# EAGLE board SparkFun_Shift_Register_Breakout-74HC595_Panel_v11b (EAGLE 7.5.0), part 1 of 2
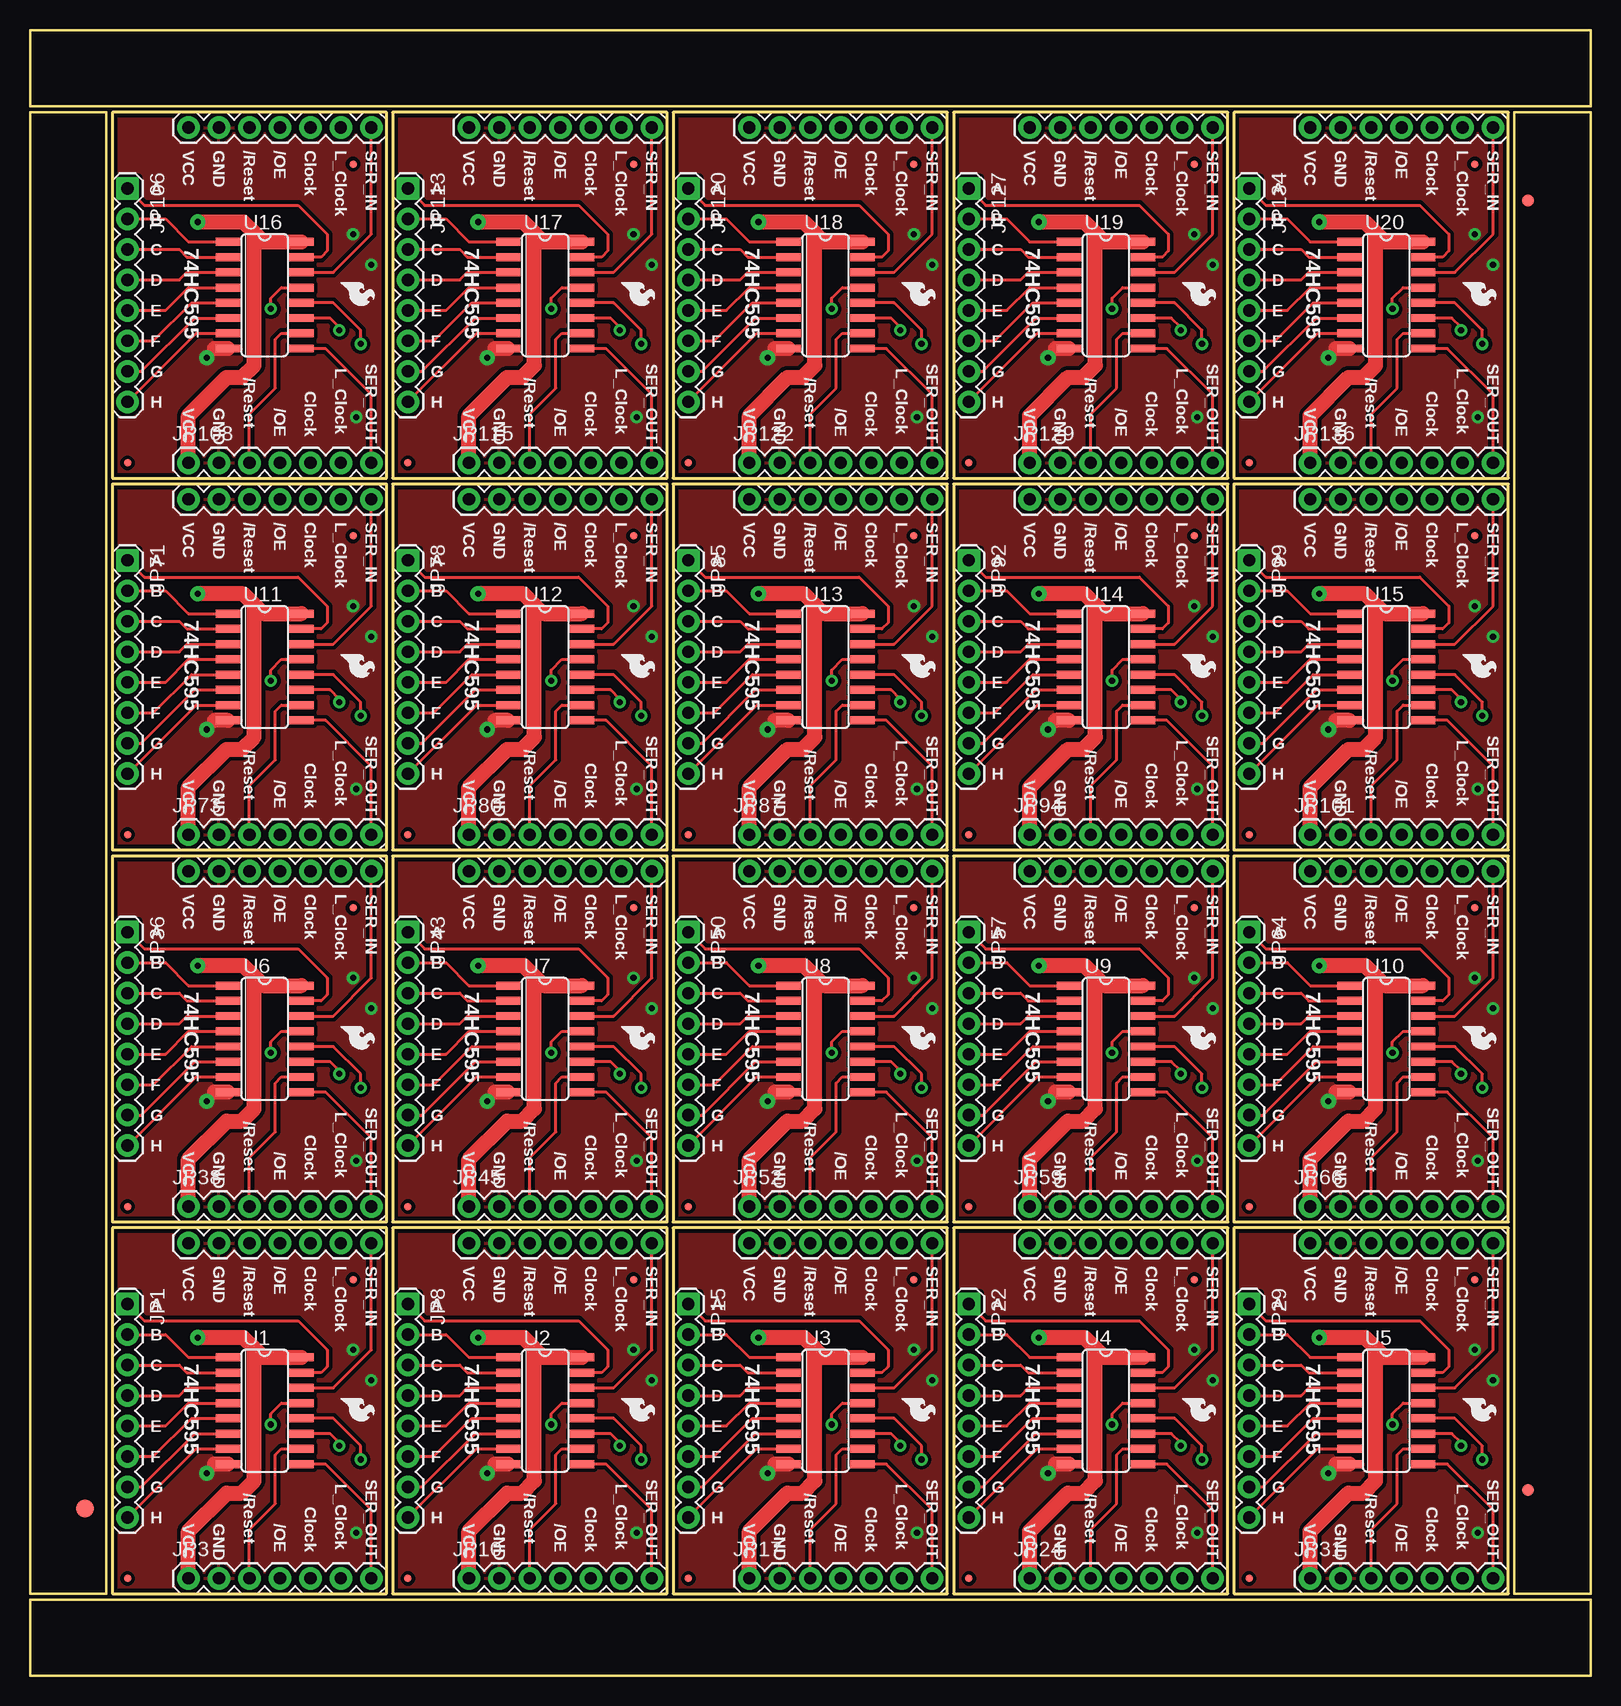
[diagram p0: board, top side]
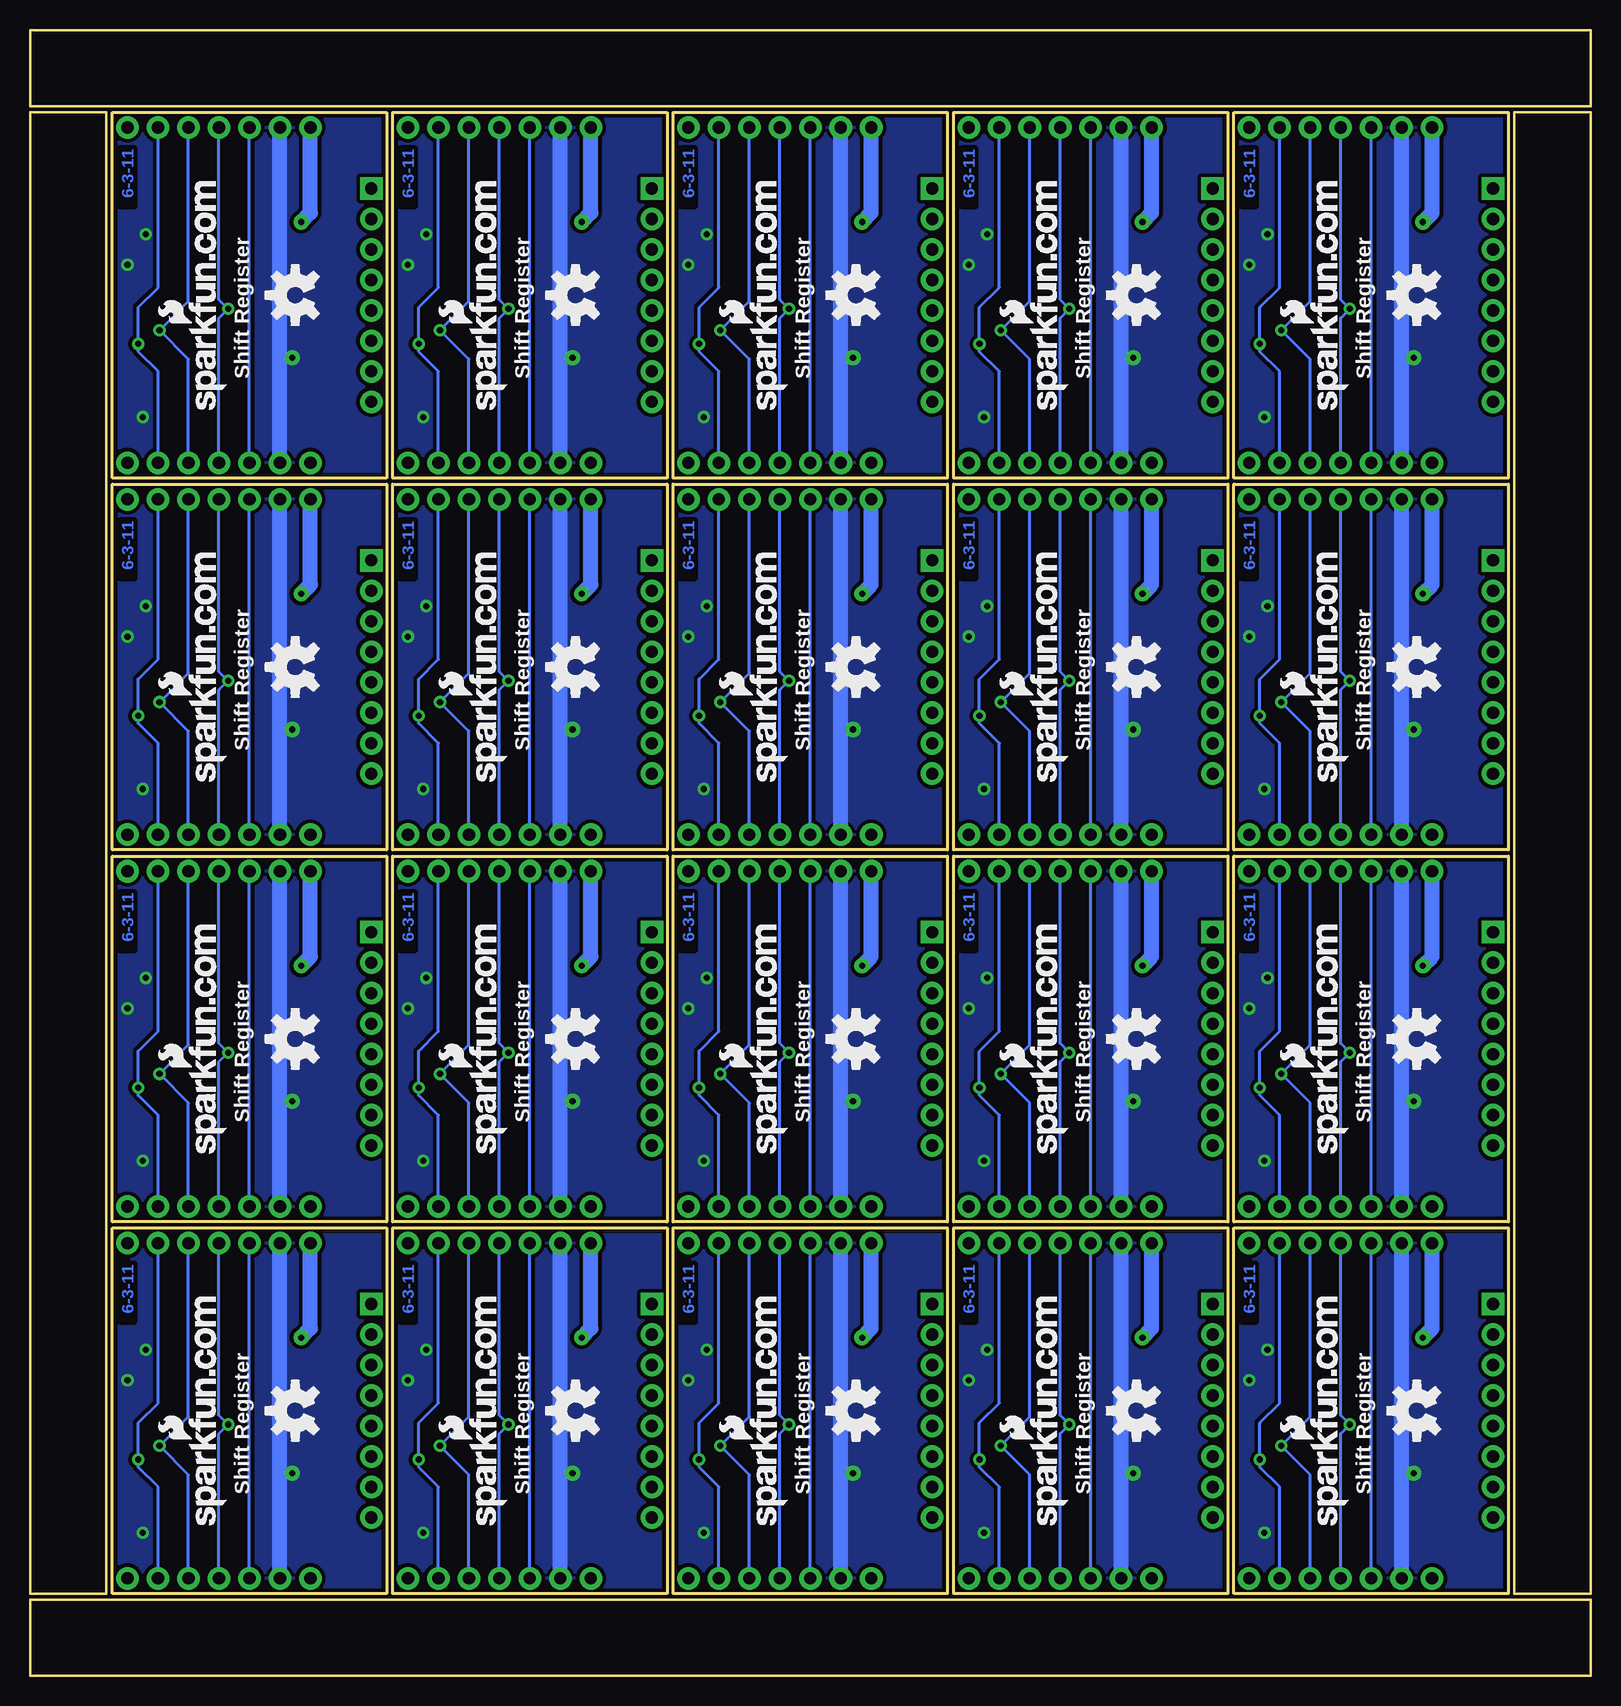
[diagram p1: board, bottom side, seen from below]

Size 130.05 x 137.16 mm. Coordinates in mm from the lower left corner, seen from the top.
Outline: 6.35,79.25 6.35,6.86 0,6.86 0,29.72
Outline: 0,27.18 0,130.3 6.35,130.3 6.35,76.71
Outline: 79.25,0 0,0 0,6.35 29.72,6.35
Outline: 27.18,6.35 130.05,6.35 130.05,0 76.71,0
Outline: 130.05,79.25 130.05,6.86 123.7,6.86 123.7,29.72
Outline: 123.7,27.18 123.7,130.3 130.05,130.3 130.05,76.71
Outline: 50.8,137.16 130.05,137.16 130.05,130.81 100.33,130.81
Outline: 102.87,130.81 0,130.81 0,137.16 53.34,137.16
Outline: 6.86,6.86 29.72,6.86 29.72,37.34 6.86,37.34 6.86,6.86
Outline: 30.23,6.86 53.09,6.86 53.09,37.34 30.23,37.34 30.23,6.86
Outline: 53.59,6.86 76.45,6.86 76.45,37.34 53.59,37.34 53.59,6.86
Outline: 76.96,6.86 99.82,6.86 99.82,37.34 76.96,37.34 76.96,6.86
Outline: 100.33,6.86 123.19,6.86 123.19,37.34 100.33,37.34 100.33,6.86
Outline: 6.86,37.85 29.72,37.85 29.72,68.33 6.86,68.33 6.86,37.85
Outline: 30.23,37.85 53.09,37.85 53.09,68.33 30.23,68.33 30.23,37.85
Outline: 53.59,37.85 76.45,37.85 76.45,68.33 53.59,68.33 53.59,37.85
Outline: 76.96,37.85 99.82,37.85 99.82,68.33 76.96,68.33 76.96,37.85
Outline: 100.33,37.85 123.19,37.85 123.19,68.33 100.33,68.33 100.33,37.85
Outline: 6.86,68.83 29.72,68.83 29.72,99.31 6.86,99.31 6.86,68.83
Outline: 30.23,68.83 53.09,68.83 53.09,99.31 30.23,99.31 30.23,68.83
Outline: 53.59,68.83 76.45,68.83 76.45,99.31 53.59,99.31 53.59,68.83
Outline: 76.96,68.83 99.82,68.83 99.82,99.31 76.96,99.31 76.96,68.83
Outline: 100.33,68.83 123.19,68.83 123.19,99.31 100.33,99.31 100.33,68.83
Outline: 6.86,99.82 29.72,99.82 29.72,130.3 6.86,130.3 6.86,99.82
Outline: 30.23,99.82 53.09,99.82 53.09,130.3 30.23,130.3 30.23,99.82
Outline: 53.59,99.82 76.45,99.82 76.45,130.3 53.59,130.3 53.59,99.82
Outline: 76.96,99.82 99.82,99.82 99.82,130.3 76.96,130.3 76.96,99.82
Outline: 100.33,99.82 123.19,99.82 123.19,130.3 100.33,130.3 100.33,99.82
Copper layers (1*16): Top 0.035mm / dielectric 1.5mm / Bottom 0.035mm
Design rules "SparkFun": minimum track width 8mil, minimum drill 20mil, track to track 8mil, track to pad 8mil, pad to pad 8mil, via to via 8mil, smd to smd 8mil, copper to edge 8mil, drill to drill 8mil, minimum pad ring 12mil, minimum via ring 10mil, stop-mask expansion 4mil, vias tented up to drill 20mil, thermal gap 10mil

## Footprints (pad centres in the part's own frame; a part is rotated, then mirrored left to right if it is on the bottom)
FIDUCIAL-1.5X3 = smd 1.5 x 1.5: 1 0,0
FIDUCIAL-1X2 = smd 1 x 1: 1 0,0
1X08 = drill 1.016 pad 1.88 square: 1 0,0 | drill 1.016 pad 1.88: 2 2.54,0; 3 5.08,0; 4 7.62,0; 5 10.16,0; 6 12.7,0; 7 15.24,0; 8 17.78,0
1X07 = drill 1.016 pad 1.88: 1 0,0; 2 2.54,0; 3 5.08,0; 4 7.62,0; 5 10.16,0; 6 12.7,0; 7 15.24,0
FIDUCIAL-1X2.5 = smd 0.635 x 0.635: 1 0,0
SO16 = smd 0.66 x 2.032: 1 -4.445,-3.073; 2 -3.175,-3.073; 3 -1.905,-3.073; 4 -0.635,-3.073; 5 0.635,-3.073; 6 1.905,-3.073; 7 3.175,-3.073; 8 4.445,-3.073; 9 4.445,3.073; 10 3.175,3.073; 11 1.905,3.073; 12 0.635,3.073; 13 -0.635,3.073; 14 -1.905,3.073; 15 -3.175,3.073; 16 -4.445,3.073

## Placement (x,y rotation side)
E$1  [FIDUCIAL-1.5X3]  4.57,13.97 0 top
E$5  [FIDUCIAL-1X2]  124.84,15.49 0 top
E$6  [FIDUCIAL-1X2]  124.84,122.94 180 top
JP1  [1X08]  8.13,30.99 270 top
JP2  [1X07]  13.21,36.07 0 top
JP3  [1X07]  13.21,8.13 0 top
JP4  LOGO-SFENEW  [SFE-NEW-WEBLOGO]  20.19,12.57 90 bottom
JP5  LOGO-SFESK  [SFE-LOGO-FLAME]  25.91,23.11 270 top
JP6  FIDUCIAL1X2.5  [FIDUCIAL-1X2.5]  8.13,8.13 0 top
JP7  FIDUCIAL1X2.5  [FIDUCIAL-1X2.5]  26.92,33.02 0 top
JP8  [1X08]  31.5,30.99 270 top
JP9  [1X07]  36.58,36.07 0 top
JP10  [1X07]  36.58,8.13 0 top
JP11  LOGO-SFENEW  [SFE-NEW-WEBLOGO]  43.56,12.57 90 bottom
JP12  LOGO-SFESK  [SFE-LOGO-FLAME]  49.28,23.11 270 top
JP13  FIDUCIAL1X2.5  [FIDUCIAL-1X2.5]  31.5,8.13 0 top
JP14  FIDUCIAL1X2.5  [FIDUCIAL-1X2.5]  50.29,33.02 0 top
JP15  [1X08]  54.86,30.99 270 top
JP16  [1X07]  59.94,36.07 0 top
JP17  [1X07]  59.94,8.13 0 top
JP18  LOGO-SFENEW  [SFE-NEW-WEBLOGO]  66.93,12.57 90 bottom
JP19  LOGO-SFESK  [SFE-LOGO-FLAME]  72.64,23.11 270 top
JP20  FIDUCIAL1X2.5  [FIDUCIAL-1X2.5]  54.86,8.13 0 top
JP21  FIDUCIAL1X2.5  [FIDUCIAL-1X2.5]  73.66,33.02 0 top
JP22  [1X08]  78.23,30.99 270 top
JP23  [1X07]  83.31,36.07 0 top
JP24  [1X07]  83.31,8.13 0 top
JP25  LOGO-SFENEW  [SFE-NEW-WEBLOGO]  90.3,12.57 90 bottom
JP26  LOGO-SFESK  [SFE-LOGO-FLAME]  96.01,23.11 270 top
JP27  FIDUCIAL1X2.5  [FIDUCIAL-1X2.5]  78.23,8.13 0 top
JP28  FIDUCIAL1X2.5  [FIDUCIAL-1X2.5]  97.03,33.02 0 top
JP29  [1X08]  101.6,30.99 270 top
JP30  [1X07]  106.68,36.07 0 top
JP31  [1X07]  106.68,8.13 0 top
JP32  LOGO-SFENEW  [SFE-NEW-WEBLOGO]  113.67,12.57 90 bottom
JP33  LOGO-SFESK  [SFE-LOGO-FLAME]  119.38,23.11 270 top
JP34  FIDUCIAL1X2.5  [FIDUCIAL-1X2.5]  101.6,8.13 0 top
JP35  FIDUCIAL1X2.5  [FIDUCIAL-1X2.5]  120.4,33.02 0 top
JP36  [1X08]  8.13,61.98 270 top
JP37  [1X07]  13.21,67.06 0 top
JP38  [1X07]  13.21,39.12 0 top
JP39  LOGO-SFENEW  [SFE-NEW-WEBLOGO]  20.19,43.56 90 bottom
JP40  LOGO-SFESK  [SFE-LOGO-FLAME]  25.91,54.1 270 top
JP41  FIDUCIAL1X2.5  [FIDUCIAL-1X2.5]  8.13,39.12 0 top
JP42  FIDUCIAL1X2.5  [FIDUCIAL-1X2.5]  26.92,64.01 0 top
JP43  [1X08]  31.5,61.98 270 top
JP44  [1X07]  36.58,67.06 0 top
JP45  [1X07]  36.58,39.12 0 top
JP46  LOGO-SFENEW  [SFE-NEW-WEBLOGO]  43.56,43.56 90 bottom
JP47  LOGO-SFESK  [SFE-LOGO-FLAME]  49.28,54.1 270 top
JP48  FIDUCIAL1X2.5  [FIDUCIAL-1X2.5]  31.5,39.12 0 top
JP49  FIDUCIAL1X2.5  [FIDUCIAL-1X2.5]  50.29,64.01 0 top
JP50  [1X08]  54.86,61.98 270 top
JP51  [1X07]  59.94,67.06 0 top
JP52  [1X07]  59.94,39.12 0 top
JP53  LOGO-SFENEW  [SFE-NEW-WEBLOGO]  66.93,43.56 90 bottom
JP54  LOGO-SFESK  [SFE-LOGO-FLAME]  72.64,54.1 270 top
JP55  FIDUCIAL1X2.5  [FIDUCIAL-1X2.5]  54.86,39.12 0 top
JP56  FIDUCIAL1X2.5  [FIDUCIAL-1X2.5]  73.66,64.01 0 top
JP57  [1X08]  78.23,61.98 270 top
JP58  [1X07]  83.31,67.06 0 top
JP59  [1X07]  83.31,39.12 0 top
JP60  LOGO-SFENEW  [SFE-NEW-WEBLOGO]  90.3,43.56 90 bottom
JP61  LOGO-SFESK  [SFE-LOGO-FLAME]  96.01,54.1 270 top
JP62  FIDUCIAL1X2.5  [FIDUCIAL-1X2.5]  78.23,39.12 0 top
JP63  FIDUCIAL1X2.5  [FIDUCIAL-1X2.5]  97.03,64.01 0 top
JP64  [1X08]  101.6,61.98 270 top
JP65  [1X07]  106.68,67.06 0 top
JP66  [1X07]  106.68,39.12 0 top
JP67  LOGO-SFENEW  [SFE-NEW-WEBLOGO]  113.67,43.56 90 bottom
JP68  LOGO-SFESK  [SFE-LOGO-FLAME]  119.38,54.1 270 top
JP69  FIDUCIAL1X2.5  [FIDUCIAL-1X2.5]  101.6,39.12 0 top
JP70  FIDUCIAL1X2.5  [FIDUCIAL-1X2.5]  120.4,64.01 0 top
JP71  [1X08]  8.13,92.96 270 top
JP72  [1X07]  13.21,98.04 0 top
JP73  [1X07]  13.21,70.1 0 top
JP74  LOGO-SFENEW  [SFE-NEW-WEBLOGO]  20.19,74.55 90 bottom
JP75  LOGO-SFESK  [SFE-LOGO-FLAME]  25.91,85.09 270 top
JP76  FIDUCIAL1X2.5  [FIDUCIAL-1X2.5]  8.13,70.1 0 top
JP77  FIDUCIAL1X2.5  [FIDUCIAL-1X2.5]  26.92,95 0 top
JP78  [1X08]  31.5,92.96 270 top
JP79  [1X07]  36.58,98.04 0 top
JP80  [1X07]  36.58,70.1 0 top
JP81  LOGO-SFENEW  [SFE-NEW-WEBLOGO]  43.56,74.55 90 bottom
JP82  LOGO-SFESK  [SFE-LOGO-FLAME]  49.28,85.09 270 top
JP83  FIDUCIAL1X2.5  [FIDUCIAL-1X2.5]  31.5,70.1 0 top
JP84  FIDUCIAL1X2.5  [FIDUCIAL-1X2.5]  50.29,95 0 top
JP85  [1X08]  54.86,92.96 270 top
JP86  [1X07]  59.94,98.04 0 top
JP87  [1X07]  59.94,70.1 0 top
JP88  LOGO-SFENEW  [SFE-NEW-WEBLOGO]  66.93,74.55 90 bottom
JP89  LOGO-SFESK  [SFE-LOGO-FLAME]  72.64,85.09 270 top
JP90  FIDUCIAL1X2.5  [FIDUCIAL-1X2.5]  54.86,70.1 0 top
JP91  FIDUCIAL1X2.5  [FIDUCIAL-1X2.5]  73.66,95 0 top
JP92  [1X08]  78.23,92.96 270 top
JP93  [1X07]  83.31,98.04 0 top
JP94  [1X07]  83.31,70.1 0 top
JP95  LOGO-SFENEW  [SFE-NEW-WEBLOGO]  90.3,74.55 90 bottom
JP96  LOGO-SFESK  [SFE-LOGO-FLAME]  96.01,85.09 270 top
JP97  FIDUCIAL1X2.5  [FIDUCIAL-1X2.5]  78.23,70.1 0 top
JP98  FIDUCIAL1X2.5  [FIDUCIAL-1X2.5]  97.03,95 0 top
JP99  [1X08]  101.6,92.96 270 top
JP100  [1X07]  106.68,98.04 0 top
JP101  [1X07]  106.68,70.1 0 top
JP102  LOGO-SFENEW  [SFE-NEW-WEBLOGO]  113.67,74.55 90 bottom
JP103  LOGO-SFESK  [SFE-LOGO-FLAME]  119.38,85.09 270 top
JP104  FIDUCIAL1X2.5  [FIDUCIAL-1X2.5]  101.6,70.1 0 top
JP105  FIDUCIAL1X2.5  [FIDUCIAL-1X2.5]  120.4,95 0 top
JP106  [1X08]  8.13,123.95 270 top
JP107  [1X07]  13.21,129.03 0 top
JP108  [1X07]  13.21,101.09 0 top
JP109  LOGO-SFENEW  [SFE-NEW-WEBLOGO]  20.19,105.54 90 bottom
JP110  LOGO-SFESK  [SFE-LOGO-FLAME]  25.91,116.08 270 top
JP111  FIDUCIAL1X2.5  [FIDUCIAL-1X2.5]  8.13,101.09 0 top
JP112  FIDUCIAL1X2.5  [FIDUCIAL-1X2.5]  26.92,125.98 0 top
JP113  [1X08]  31.5,123.95 270 top
JP114  [1X07]  36.58,129.03 0 top
JP115  [1X07]  36.58,101.09 0 top
JP116  LOGO-SFENEW  [SFE-NEW-WEBLOGO]  43.56,105.54 90 bottom
JP117  LOGO-SFESK  [SFE-LOGO-FLAME]  49.28,116.08 270 top
JP118  FIDUCIAL1X2.5  [FIDUCIAL-1X2.5]  31.5,101.09 0 top
JP119  FIDUCIAL1X2.5  [FIDUCIAL-1X2.5]  50.29,125.98 0 top
JP120  [1X08]  54.86,123.95 270 top
JP121  [1X07]  59.94,129.03 0 top
JP122  [1X07]  59.94,101.09 0 top
JP123  LOGO-SFENEW  [SFE-NEW-WEBLOGO]  66.93,105.54 90 bottom
JP124  LOGO-SFESK  [SFE-LOGO-FLAME]  72.64,116.08 270 top
JP125  FIDUCIAL1X2.5  [FIDUCIAL-1X2.5]  54.86,101.09 0 top
JP126  FIDUCIAL1X2.5  [FIDUCIAL-1X2.5]  73.66,125.98 0 top
JP127  [1X08]  78.23,123.95 270 top
JP128  [1X07]  83.31,129.03 0 top
JP129  [1X07]  83.31,101.09 0 top
JP130  LOGO-SFENEW  [SFE-NEW-WEBLOGO]  90.3,105.54 90 bottom
JP131  LOGO-SFESK  [SFE-LOGO-FLAME]  96.01,116.08 270 top
JP132  FIDUCIAL1X2.5  [FIDUCIAL-1X2.5]  78.23,101.09 0 top
JP133  FIDUCIAL1X2.5  [FIDUCIAL-1X2.5]  97.03,125.98 0 top
JP134  [1X08]  101.6,123.95 270 top
JP135  [1X07]  106.68,129.03 0 top
JP136  [1X07]  106.68,101.09 0 top
JP137  LOGO-SFENEW  [SFE-NEW-WEBLOGO]  113.67,105.54 90 bottom
JP138  LOGO-SFESK  [SFE-LOGO-FLAME]  119.38,116.08 270 top
JP139  FIDUCIAL1X2.5  [FIDUCIAL-1X2.5]  101.6,101.09 0 top
JP140  FIDUCIAL1X2.5  [FIDUCIAL-1X2.5]  120.4,125.98 0 top
U1  74LS595D  [SO16]  19.56,22.1 270 top
U2  74LS595D  [SO16]  42.93,22.1 270 top
U3  74LS595D  [SO16]  66.29,22.1 270 top
U4  74LS595D  [SO16]  89.66,22.1 270 top
U5  74LS595D  [SO16]  113.03,22.1 270 top
U6  74LS595D  [SO16]  19.56,53.09 270 top
U7  74LS595D  [SO16]  42.93,53.09 270 top
U8  74LS595D  [SO16]  66.29,53.09 270 top
U9  74LS595D  [SO16]  89.66,53.09 270 top
U10  74LS595D  [SO16]  113.03,53.09 270 top
U11  74LS595D  [SO16]  19.56,84.07 270 top
U12  74LS595D  [SO16]  42.93,84.07 270 top
U13  74LS595D  [SO16]  66.29,84.07 270 top
U14  74LS595D  [SO16]  89.66,84.07 270 top
U15  74LS595D  [SO16]  113.03,84.07 270 top
U16  74LS595D  [SO16]  19.56,115.06 270 top
U17  74LS595D  [SO16]  42.93,115.06 270 top
U18  74LS595D  [SO16]  66.29,115.06 270 top
U19  74LS595D  [SO16]  89.66,115.06 270 top
U20  74LS595D  [SO16]  113.03,115.06 270 top
U$1  OSHW-LOGOM  [OSHW-LOGO-M]  14.48,22.1 90 bottom
U$2  OSHW-LOGOM  [OSHW-LOGO-M]  37.85,22.1 90 bottom
U$3  OSHW-LOGOM  [OSHW-LOGO-M]  61.21,22.1 90 bottom
U$4  OSHW-LOGOM  [OSHW-LOGO-M]  84.58,22.1 90 bottom
U$5  OSHW-LOGOM  [OSHW-LOGO-M]  107.95,22.1 90 bottom
U$6  OSHW-LOGOM  [OSHW-LOGO-M]  14.48,53.09 90 bottom
U$7  OSHW-LOGOM  [OSHW-LOGO-M]  37.85,53.09 90 bottom
U$8  OSHW-LOGOM  [OSHW-LOGO-M]  61.21,53.09 90 bottom
U$9  OSHW-LOGOM  [OSHW-LOGO-M]  84.58,53.09 90 bottom
U$10  OSHW-LOGOM  [OSHW-LOGO-M]  107.95,53.09 90 bottom
U$11  OSHW-LOGOM  [OSHW-LOGO-M]  14.48,84.07 90 bottom
U$12  OSHW-LOGOM  [OSHW-LOGO-M]  37.85,84.07 90 bottom
U$13  OSHW-LOGOM  [OSHW-LOGO-M]  61.21,84.07 90 bottom
U$14  OSHW-LOGOM  [OSHW-LOGO-M]  84.58,84.07 90 bottom
U$15  OSHW-LOGOM  [OSHW-LOGO-M]  107.95,84.07 90 bottom
U$16  OSHW-LOGOM  [OSHW-LOGO-M]  14.48,115.06 90 bottom
U$17  OSHW-LOGOM  [OSHW-LOGO-M]  37.85,115.06 90 bottom
U$18  OSHW-LOGOM  [OSHW-LOGO-M]  61.21,115.06 90 bottom
U$19  OSHW-LOGOM  [OSHW-LOGO-M]  84.58,115.06 90 bottom
U$20  OSHW-LOGOM  [OSHW-LOGO-M]  107.95,115.06 90 bottom

## Library data of the parts
E$1 = SparkFun-Retired
E$5 E$6 = SparkFun-Aesthetics
JP1-JP5 JP8-JP12 JP15-JP19 JP22-JP26 JP29-JP33 JP36-JP40 JP43-JP47 JP50-JP54 JP57-JP61 JP64-JP68 JP71-JP75 JP78-JP82 JP85-JP89 JP92-JP96 JP99-JP103 JP106-JP110 JP113-JP117 JP120-JP124 JP127-JP131 JP134-JP138 U1-U20 U$1-U$20 = SparkFun
JP6 JP7 JP13 JP14 JP20 JP21 JP27 JP28 JP34 JP35 JP41 JP42 JP48 JP49 JP55 JP56 JP62 JP63 JP69 JP70 JP76 JP77 JP83 JP84 JP90 JP91 JP97 JP98 JP104 JP105 JP111 JP112 JP118 JP119 JP125 JP126 JP132 JP133 JP139 JP140 = abes

## Nets
/OUTPUT_ENABLE: JP2.4 JP3.4 U1.13
/OUTPUT_ENABLE1: JP9.4 JP10.4 U2.13
/OUTPUT_ENABLE2: JP16.4 JP17.4 U3.13
/OUTPUT_ENABLE3: JP23.4 JP24.4 U4.13
/OUTPUT_ENABLE4: JP30.4 JP31.4 U5.13
/OUTPUT_ENABLE5: JP37.4 JP38.4 U6.13
/OUTPUT_ENABLE6: JP44.4 JP45.4 U7.13
/OUTPUT_ENABLE7: JP51.4 JP52.4 U8.13
/OUTPUT_ENABLE8: JP58.4 JP59.4 U9.13
/OUTPUT_ENABLE9: JP65.4 JP66.4 U10.13
/OUTPUT_ENABLE10: JP72.4 JP73.4 U11.13
/OUTPUT_ENABLE11: JP79.4 JP80.4 U12.13
/OUTPUT_ENABLE12: JP86.4 JP87.4 U13.13
/OUTPUT_ENABLE13: JP93.4 JP94.4 U14.13
/OUTPUT_ENABLE14: JP100.4 JP101.4 U15.13
/OUTPUT_ENABLE15: JP107.4 JP108.4 U16.13
/OUTPUT_ENABLE16: JP114.4 JP115.4 U17.13
/OUTPUT_ENABLE17: JP121.4 JP122.4 U18.13
/OUTPUT_ENABLE18: JP128.4 JP129.4 U19.13
/OUTPUT_ENABLE19: JP135.4 JP136.4 U20.13
/RESET: JP2.3 JP3.3 U1.10
/RESET1: JP9.3 JP10.3 U2.10
/RESET2: JP16.3 JP17.3 U3.10
/RESET3: JP23.3 JP24.3 U4.10
/RESET4: JP30.3 JP31.3 U5.10
/RESET5: JP37.3 JP38.3 U6.10
/RESET6: JP44.3 JP45.3 U7.10
/RESET7: JP51.3 JP52.3 U8.10
/RESET8: JP58.3 JP59.3 U9.10
/RESET9: JP65.3 JP66.3 U10.10
/RESET10: JP72.3 JP73.3 U11.10
/RESET11: JP79.3 JP80.3 U12.10
/RESET12: JP86.3 JP87.3 U13.10
/RESET13: JP93.3 JP94.3 U14.10
/RESET14: JP100.3 JP101.3 U15.10
/RESET15: JP107.3 JP108.3 U16.10
/RESET16: JP114.3 JP115.3 U17.10
/RESET17: JP121.3 JP122.3 U18.10
/RESET18: JP128.3 JP129.3 U19.10
/RESET19: JP135.3 JP136.3 U20.10
CLOCK: JP2.5 JP3.5 U1.11
CLOCK1: JP9.5 JP10.5 U2.11
CLOCK2: JP16.5 JP17.5 U3.11
CLOCK3: JP23.5 JP24.5 U4.11
CLOCK4: JP30.5 JP31.5 U5.11
CLOCK5: JP37.5 JP38.5 U6.11
CLOCK6: JP44.5 JP45.5 U7.11
CLOCK7: JP51.5 JP52.5 U8.11
CLOCK8: JP58.5 JP59.5 U9.11
CLOCK9: JP65.5 JP66.5 U10.11
CLOCK10: JP72.5 JP73.5 U11.11
CLOCK11: JP79.5 JP80.5 U12.11
CLOCK12: JP86.5 JP87.5 U13.11
CLOCK13: JP93.5 JP94.5 U14.11
CLOCK14: JP100.5 JP101.5 U15.11
CLOCK15: JP107.5 JP108.5 U16.11
CLOCK16: JP114.5 JP115.5 U17.11
CLOCK17: JP121.5 JP122.5 U18.11
CLOCK18: JP128.5 JP129.5 U19.11
CLOCK19: JP135.5 JP136.5 U20.11
GND: JP2.2 JP3.2 U1.8
GND1: JP9.2 JP10.2 U2.8
GND2: JP16.2 JP17.2 U3.8
GND3: JP23.2 JP24.2 U4.8
GND4: JP30.2 JP31.2 U5.8
GND5: JP37.2 JP38.2 U6.8
GND6: JP44.2 JP45.2 U7.8
GND7: JP51.2 JP52.2 U8.8
GND8: JP58.2 JP59.2 U9.8
GND9: JP65.2 JP66.2 U10.8
GND10: JP72.2 JP73.2 U11.8
GND11: JP79.2 JP80.2 U12.8
GND12: JP86.2 JP87.2 U13.8
GND13: JP93.2 JP94.2 U14.8
GND14: JP100.2 JP101.2 U15.8
GND15: JP107.2 JP108.2 U16.8
GND16: JP114.2 JP115.2 U17.8
GND17: JP121.2 JP122.2 U18.8
GND18: JP128.2 JP129.2 U19.8
GND19: JP135.2 JP136.2 U20.8
LATCH_CLOCK: JP2.6 JP3.6 U1.12
LATCH_CLOCK1: JP9.6 JP10.6 U2.12
LATCH_CLOCK2: JP16.6 JP17.6 U3.12
LATCH_CLOCK3: JP23.6 JP24.6 U4.12
LATCH_CLOCK4: JP30.6 JP31.6 U5.12
LATCH_CLOCK5: JP37.6 JP38.6 U6.12
LATCH_CLOCK6: JP44.6 JP45.6 U7.12
LATCH_CLOCK7: JP51.6 JP52.6 U8.12
LATCH_CLOCK8: JP58.6 JP59.6 U9.12
LATCH_CLOCK9: JP65.6 JP66.6 U10.12
LATCH_CLOCK10: JP72.6 JP73.6 U11.12
LATCH_CLOCK11: JP79.6 JP80.6 U12.12
LATCH_CLOCK12: JP86.6 JP87.6 U13.12
LATCH_CLOCK13: JP93.6 JP94.6 U14.12
LATCH_CLOCK14: JP100.6 JP101.6 U15.12
LATCH_CLOCK15: JP107.6 JP108.6 U16.12
LATCH_CLOCK16: JP114.6 JP115.6 U17.12
LATCH_CLOCK17: JP121.6 JP122.6 U18.12
LATCH_CLOCK18: JP128.6 JP129.6 U19.12
LATCH_CLOCK19: JP135.6 JP136.6 U20.12
N$1: JP8.1 U2.15
N$2: JP8.2 U2.1
N$3: JP1.1 U1.15
N$4: JP1.2 U1.1
N$5: JP1.3 U1.2
N$6: JP1.4 U1.3
N$7: JP1.5 U1.4
N$8: JP1.6 U1.5
N$9: JP1.7 U1.6
N$10: JP1.8 U1.7
N$11: JP8.3 U2.2
N$12: JP8.4 U2.3
N$13: JP8.5 U2.4
N$14: JP8.6 U2.5
N$15: JP8.7 U2.6
N$16: JP8.8 U2.7
N$17: JP15.1 U3.15
N$18: JP15.2 U3.1
N$19: JP15.3 U3.2
N$20: JP15.4 U3.3
N$21: JP15.5 U3.4
N$22: JP15.6 U3.5
N$23: JP15.7 U3.6
N$24: JP15.8 U3.7
N$25: JP22.1 U4.15
N$26: JP22.2 U4.1
N$27: JP22.3 U4.2
N$28: JP22.4 U4.3
N$29: JP22.5 U4.4
N$30: JP22.6 U4.5
N$31: JP22.7 U4.6
N$32: JP22.8 U4.7
N$33: JP29.1 U5.15
N$34: JP29.2 U5.1
N$35: JP29.3 U5.2
N$36: JP29.4 U5.3
N$37: JP29.5 U5.4
N$38: JP29.6 U5.5
N$39: JP29.7 U5.6
N$40: JP29.8 U5.7
N$41: JP36.1 U6.15
N$42: JP36.2 U6.1
N$43: JP36.3 U6.2
N$44: JP36.4 U6.3
N$45: JP36.5 U6.4
N$46: JP36.6 U6.5
N$47: JP36.7 U6.6
N$48: JP36.8 U6.7
N$49: JP43.1 U7.15
N$50: JP43.2 U7.1
N$51: JP43.3 U7.2
N$52: JP43.4 U7.3
N$53: JP43.5 U7.4
N$54: JP43.6 U7.5
N$55: JP43.7 U7.6
N$56: JP43.8 U7.7
N$57: JP50.1 U8.15
N$58: JP50.2 U8.1
N$59: JP50.3 U8.2
N$60: JP50.4 U8.3
N$61: JP50.5 U8.4
N$62: JP50.6 U8.5
N$63: JP50.7 U8.6
N$64: JP50.8 U8.7
N$65: JP57.1 U9.15
N$66: JP57.2 U9.1
N$67: JP57.3 U9.2
N$68: JP57.4 U9.3
N$69: JP57.5 U9.4
N$70: JP57.6 U9.5
N$71: JP57.7 U9.6
N$72: JP57.8 U9.7
N$73: JP64.1 U10.15
N$74: JP64.2 U10.1
N$75: JP64.3 U10.2
N$76: JP64.4 U10.3
N$77: JP64.5 U10.4
N$78: JP64.6 U10.5
N$79: JP64.7 U10.6
N$80: JP64.8 U10.7
N$81: JP71.1 U11.15
N$82: JP71.2 U11.1
N$83: JP71.3 U11.2
N$84: JP71.4 U11.3
N$85: JP71.5 U11.4
N$86: JP71.6 U11.5
N$87: JP71.7 U11.6
N$88: JP71.8 U11.7
N$89: JP78.1 U12.15
N$90: JP78.2 U12.1
N$91: JP78.3 U12.2
N$92: JP78.4 U12.3
N$93: JP78.5 U12.4
N$94: JP78.6 U12.5
N$95: JP78.7 U12.6
N$96: JP78.8 U12.7
N$97: JP85.1 U13.15
N$98: JP85.2 U13.1
N$99: JP85.3 U13.2
N$100: JP85.4 U13.3
N$101: JP85.5 U13.4
N$102: JP85.6 U13.5
N$103: JP85.7 U13.6
N$104: JP85.8 U13.7
N$105: JP92.1 U14.15
N$106: JP92.2 U14.1
N$107: JP92.3 U14.2
N$108: JP92.4 U14.3
N$109: JP92.5 U14.4
N$110: JP92.6 U14.5
N$111: JP92.7 U14.6
N$112: JP92.8 U14.7
N$113: JP99.1 U15.15
N$114: JP99.2 U15.1
N$115: JP99.3 U15.2
N$116: JP99.4 U15.3
N$117: JP99.5 U15.4
N$118: JP99.6 U15.5
N$119: JP99.7 U15.6
N$120: JP99.8 U15.7
N$121: JP106.1 U16.15
N$122: JP106.2 U16.1
N$123: JP106.3 U16.2
N$124: JP106.4 U16.3
N$125: JP106.5 U16.4
N$126: JP106.6 U16.5
N$127: JP106.7 U16.6
N$128: JP106.8 U16.7
N$129: JP113.1 U17.15
N$130: JP113.2 U17.1
N$131: JP113.3 U17.2
N$132: JP113.4 U17.3
N$133: JP113.5 U17.4
N$134: JP113.6 U17.5
N$135: JP113.7 U17.6
N$136: JP113.8 U17.7
N$137: JP120.1 U18.15
N$138: JP120.2 U18.1
N$139: JP120.3 U18.2
N$140: JP120.4 U18.3
N$141: JP120.5 U18.4
N$142: JP120.6 U18.5
N$143: JP120.7 U18.6
N$144: JP120.8 U18.7
N$145: JP127.1 U19.15
N$146: JP127.2 U19.1
N$147: JP127.3 U19.2
N$148: JP127.4 U19.3
N$149: JP127.5 U19.4
N$150: JP127.6 U19.5
N$151: JP127.7 U19.6
N$152: JP127.8 U19.7
N$153: JP134.1 U20.15
N$154: JP134.2 U20.1
N$155: JP134.3 U20.2
N$156: JP134.4 U20.3
N$157: JP134.5 U20.4
N$158: JP134.6 U20.5
N$159: JP134.7 U20.6
N$160: JP134.8 U20.7
SERIAL_IN: JP2.7 U1.14
SERIAL_IN1: JP9.7 U2.14
SERIAL_IN2: JP16.7 U3.14
SERIAL_IN3: JP23.7 U4.14
SERIAL_IN4: JP30.7 U5.14
SERIAL_IN5: JP37.7 U6.14
SERIAL_IN6: JP44.7 U7.14
SERIAL_IN7: JP51.7 U8.14
SERIAL_IN8: JP58.7 U9.14
SERIAL_IN9: JP65.7 U10.14
SERIAL_IN10: JP72.7 U11.14
SERIAL_IN11: JP79.7 U12.14
SERIAL_IN12: JP86.7 U13.14
SERIAL_IN13: JP93.7 U14.14
SERIAL_IN14: JP100.7 U15.14
SERIAL_IN15: JP107.7 U16.14
SERIAL_IN16: JP114.7 U17.14
SERIAL_IN17: JP121.7 U18.14
SERIAL_IN18: JP128.7 U19.14
SERIAL_IN19: JP135.7 U20.14
SERIAL_OUT: JP3.7 U1.9
SERIAL_OUT1: JP10.7 U2.9
SERIAL_OUT2: JP17.7 U3.9
SERIAL_OUT3: JP24.7 U4.9
SERIAL_OUT4: JP31.7 U5.9
SERIAL_OUT5: JP38.7 U6.9
SERIAL_OUT6: JP45.7 U7.9
SERIAL_OUT7: JP52.7 U8.9
SERIAL_OUT8: JP59.7 U9.9
SERIAL_OUT9: JP66.7 U10.9
SERIAL_OUT10: JP73.7 U11.9
SERIAL_OUT11: JP80.7 U12.9
SERIAL_OUT12: JP87.7 U13.9
SERIAL_OUT13: JP94.7 U14.9
SERIAL_OUT14: JP101.7 U15.9
SERIAL_OUT15: JP108.7 U16.9
SERIAL_OUT16: JP115.7 U17.9
SERIAL_OUT17: JP122.7 U18.9
SERIAL_OUT18: JP129.7 U19.9
SERIAL_OUT19: JP136.7 U20.9
VCC: JP2.1 JP3.1 U1.16
VCC1: JP9.1 JP10.1 U2.16
VCC2: JP16.1 JP17.1 U3.16
VCC3: JP23.1 JP24.1 U4.16
VCC4: JP30.1 JP31.1 U5.16
VCC5: JP37.1 JP38.1 U6.16
VCC6: JP44.1 JP45.1 U7.16
VCC7: JP51.1 JP52.1 U8.16
VCC8: JP58.1 JP59.1 U9.16
VCC9: JP65.1 JP66.1 U10.16
VCC10: JP72.1 JP73.1 U11.16
VCC11: JP79.1 JP80.1 U12.16
VCC12: JP86.1 JP87.1 U13.16
VCC13: JP93.1 JP94.1 U14.16
VCC14: JP100.1 JP101.1 U15.16
VCC15: JP107.1 JP108.1 U16.16
VCC16: JP114.1 JP115.1 U17.16
VCC17: JP121.1 JP122.1 U18.16
VCC18: JP128.1 JP129.1 U19.16
VCC19: JP135.1 JP136.1 U20.16